# EAGLE board ponte_ampli_V1.2 (EAGLE 4.09)

Size 160 x 100 mm. Coordinates in mm from the lower left corner, seen from the top.
Outline: 0,0 160,0 160,100 0,100 0,0
Copper layers used: 

## Footprints (pad centres in the part's own frame; a part is rotated, then mirrored left to right if it is on the bottom)
C-5 = drill 0.813 pad 1.6 octagon: 1 -2.54,0; 2 2.54,0
ES-2,5L = drill 0.61 pad 1.27 octagon: 1 0,0; 2 2.54,0
DIL14 = drill 0.813 offset: 1 -7.62,-3.81; 2 -5.08,-3.81; 3 -2.54,-3.81; 4 0,-3.81; 5 2.54,-3.81; 6 5.08,-3.81; 7 7.62,-3.81; 8 7.62,3.81; 9 5.08,3.81; 10 2.54,3.81; 11 0,3.81; 12 -2.54,3.81; 13 -5.08,3.81; 14 -7.62,3.81
78XXL = drill 1.016 offset: GND 0,-3.81; IN -2.54,-3.81; OUT 2.54,-3.81 | hole 3.302: 0,11.176
R-7,5 = drill 0.813 pad 1.6 octagon: 1 -3.81,0; 2 3.81,0
S64W = drill 0.813 offset: A 2.54,1.27; E -2.54,1.27; S 0,1.27
AK500/6 = drill 1.321 offset: 1 -12.522,0; 2 -7.518,0; 3 -2.515,0; 4 2.515,0; 5 7.518,0; 6 12.522,0

## Placement (x,y rotation side)
C1  [C-5]  -28.58,-14.77 180 top  (outside the outline)
C2  [C-5]  -42.55,-2.07 270 top  (outside the outline)
C3  [C-5]  -15.88,-22.39 270 top  (outside the outline)
C4  [C-5]  -26.04,5.55 180 top  (outside the outline)
C5  [C-5]  -10.8,-2.07 270 top  (outside the outline)
C6  [ES-2,5L]  -55.25,-14.77 0 top  (outside the outline)
C7  [C-5]  -50.17,-90.97 0 top  (outside the outline)
C8  [C-5]  -50.17,-169.71 0 top  (outside the outline)
C9  [C-5]  -50.17,-178.6 0 top  (outside the outline)
C10  [C-5]  -50.17,-187.49 0 top  (outside the outline)
C11  [C-5]  -50.17,-196.38 0 top  (outside the outline)
C12  [C-5]  -50.17,-257.34 0 top  (outside the outline)
C13  [C-5]  -50.17,-336.08 0 top  (outside the outline)
C14  [C-5]  -50.17,-344.97 0 top  (outside the outline)
C15  [C-5]  -50.17,-353.86 0 top  (outside the outline)
C16  [C-5]  -50.17,-362.75 0 top  (outside the outline)
C17  [C-5]  -50.17,-423.71 0 top  (outside the outline)
C18  [C-5]  -50.17,-502.45 0 top  (outside the outline)
C19  [C-5]  -50.17,-511.34 0 top  (outside the outline)
C20  [C-5]  -50.17,-520.23 0 top  (outside the outline)
C21  [C-5]  -50.17,-529.12 0 top  (outside the outline)
C22  [C-5]  -50.17,-590.08 0 top  (outside the outline)
C23  [C-5]  -50.17,-668.82 0 top  (outside the outline)
C24  [C-5]  -50.17,-677.71 0 top  (outside the outline)
C25  [C-5]  -50.17,-686.6 0 top  (outside the outline)
C26  [C-5]  -50.17,-695.49 0 top  (outside the outline)
C27  [C-5]  -50.17,-756.45 0 top  (outside the outline)
C28  [C-5]  -50.17,-835.19 0 top  (outside the outline)
C29  [C-5]  -50.17,-844.08 0 top  (outside the outline)
C30  [C-5]  -50.17,-844.08 0 top  (outside the outline)
C31  [C-5]  -50.17,-844.08 0 top  (outside the outline)
C32  [ES-2,5L]  -64.14,-833.92 0 top  (outside the outline)
C33  [ES-2,5L]  -74.3,-833.92 0 top  (outside the outline)
C34  [ES-2,5L]  -83.19,-833.92 0 top  (outside the outline)
C35  [ES-2,5L]  -93.35,-833.92 0 top  (outside the outline)
C36  [ES-2,5L]  -103.51,-833.92 0 top  (outside the outline)
IC1  TL084P  [DIL14]  -26.04,-3.34 0 top  (outside the outline)
IC2  TL084P  [DIL14]  -45.09,-55.41 0 top  (outside the outline)
IC3  7805  [78XXL]  -51.44,-2.07 0 top  (outside the outline)
IC4  TL084P  [DIL14]  -45.09,-221.78 0 top  (outside the outline)
IC5  TL084P  [DIL14]  -45.09,-388.15 0 top  (outside the outline)
IC6  TL084P  [DIL14]  -45.09,-554.52 0 top  (outside the outline)
IC7  TL084P  [DIL14]  -45.09,-720.89 0 top  (outside the outline)
R1  [R-7,5]  -23.5,-18.58 90 top  (outside the outline)
R2  [R-7,5]  -32.39,-10.96 180 top  (outside the outline)
R3  [R-7,5]  -36.2,-18.58 90 top  (outside the outline)
R4  [R-7,5]  -40.01,-24.93 180 top  (outside the outline)
R5  [S64W]  -36.2,-28.74 180 top  (outside the outline)
R6  [R-7,5]  -37.47,-3.34 270 top  (outside the outline)
R7  [R-7,5]  -24.77,-24.93 180 top  (outside the outline)
R8  [R-7,5]  -12.07,-10.96 0 top  (outside the outline)
R9  [R-7,5]  -18.42,-14.77 90 top  (outside the outline)
R10  [R-7,5]  -29.85,-18.58 180 top  (outside the outline)
R11  [R-7,5]  -14.61,-3.34 90 top  (outside the outline)
R12  [R-7,5]  -40.01,-18.58 90 top  (outside the outline)
R13  [R-7,5]  -48.9,-66.84 0 top  (outside the outline)
R14  [R-7,5]  -48.9,-74.46 0 top  (outside the outline)
R15  [R-7,5]  -48.9,-82.08 0 top  (outside the outline)
R16  [S64W]  -50.17,-101.13 0 top  (outside the outline)
R17  [R-7,5]  -48.9,-107.48 0 top  (outside the outline)
R18  [R-7,5]  -48.9,-115.1 0 top  (outside the outline)
R19  [R-7,5]  -48.9,-122.72 0 top  (outside the outline)
R20  [R-7,5]  -48.9,-130.34 0 top  (outside the outline)
R21  [R-7,5]  -48.9,-137.96 0 top  (outside the outline)
R22  [R-7,5]  -48.9,-145.58 0 top  (outside the outline)
R23  [R-7,5]  -48.9,-153.2 0 top  (outside the outline)
R24  [R-7,5]  -48.9,-160.82 0 top  (outside the outline)
R25  [R-7,5]  -48.9,-233.21 0 top  (outside the outline)
R26  [R-7,5]  -48.9,-240.83 0 top  (outside the outline)
R27  [R-7,5]  -48.9,-248.45 0 top  (outside the outline)
R28  [S64W]  -50.17,-267.5 0 top  (outside the outline)
R29  [R-7,5]  -48.9,-273.85 0 top  (outside the outline)
R30  [R-7,5]  -48.9,-281.47 0 top  (outside the outline)
R31  [R-7,5]  -48.9,-289.09 0 top  (outside the outline)
R32  [R-7,5]  -48.9,-296.71 0 top  (outside the outline)
R33  [R-7,5]  -48.9,-304.33 0 top  (outside the outline)
R34  [R-7,5]  -48.9,-311.95 0 top  (outside the outline)
R35  [R-7,5]  -48.9,-319.57 0 top  (outside the outline)
R36  [R-7,5]  -48.9,-327.19 0 top  (outside the outline)
R37  [R-7,5]  -48.9,-399.58 0 top  (outside the outline)
R38  [R-7,5]  -48.9,-407.2 0 top  (outside the outline)
R39  [R-7,5]  -48.9,-414.82 0 top  (outside the outline)
R40  [S64W]  -50.17,-433.87 0 top  (outside the outline)
R41  [R-7,5]  -48.9,-440.22 0 top  (outside the outline)
R42  [R-7,5]  -48.9,-447.84 0 top  (outside the outline)
R43  [R-7,5]  -48.9,-455.46 0 top  (outside the outline)
R44  [R-7,5]  -48.9,-463.08 0 top  (outside the outline)
R45  [R-7,5]  -48.9,-470.7 0 top  (outside the outline)
R46  [R-7,5]  -48.9,-478.32 0 top  (outside the outline)
R47  [R-7,5]  -48.9,-485.94 0 top  (outside the outline)
R48  [R-7,5]  -48.9,-493.56 0 top  (outside the outline)
R49  [R-7,5]  -48.9,-565.95 0 top  (outside the outline)
R50  [R-7,5]  -48.9,-573.57 0 top  (outside the outline)
R51  [R-7,5]  -48.9,-581.19 0 top  (outside the outline)
R52  [S64W]  -50.17,-600.24 0 top  (outside the outline)
R53  [R-7,5]  -48.9,-606.59 0 top  (outside the outline)
R54  [R-7,5]  -48.9,-614.21 0 top  (outside the outline)
R55  [R-7,5]  -48.9,-621.83 0 top  (outside the outline)
R56  [R-7,5]  -48.9,-629.45 0 top  (outside the outline)
R57  [R-7,5]  -48.9,-637.07 0 top  (outside the outline)
R58  [R-7,5]  -48.9,-644.69 0 top  (outside the outline)
R59  [R-7,5]  -48.9,-652.31 0 top  (outside the outline)
R60  [R-7,5]  -48.9,-659.93 0 top  (outside the outline)
R61  [R-7,5]  -48.9,-732.32 0 top  (outside the outline)
R62  [R-7,5]  -48.9,-739.94 0 top  (outside the outline)
R63  [R-7,5]  -48.9,-747.56 0 top  (outside the outline)
R64  [S64W]  -50.17,-766.61 0 top  (outside the outline)
R65  [R-7,5]  -48.9,-772.96 0 top  (outside the outline)
R66  [R-7,5]  -48.9,-780.58 0 top  (outside the outline)
R67  [R-7,5]  -48.9,-788.2 0 top  (outside the outline)
R68  [R-7,5]  -48.9,-795.82 0 top  (outside the outline)
R69  [R-7,5]  -48.9,-803.44 0 top  (outside the outline)
R70  [R-7,5]  -48.9,-811.06 0 top  (outside the outline)
R71  [R-7,5]  -48.9,-818.68 0 top  (outside the outline)
R72  [R-7,5]  -48.9,-826.3 0 top  (outside the outline)
X1  [AK500/6]  -40.01,-41.44 0 top  (outside the outline)

## Library data of the parts
C1-C36 R1-R4 R6-R15 R17-R27 R29-R39 R41-R51 R53-R63 R65-R72 = discrete
IC1 IC2 IC4-IC7 = linear
IC3 = v-reg
R5 R16 R28 R40 R52 R64 = pot
X1 = con-ptr500

## Nets
+5V: IC3.OUT R1.1 R4.2 R5.A R13.1 R16.A R17.2 R25.1 R28.A R29.2 R37.1 R40.A R41.2 R49.1 R52.A R53.2 R61.1 R64.A R65.2
+12V: C6.1 C32.1 C33.1 C34.1 C35.1 C36.1 IC1.4 IC2.4 IC3.IN IC4.4 IC5.4 IC6.4 IC7.4
-12V: C6.2 C32.2 C33.2 C34.2 C35.2 C36.2 IC1.11 IC2.11 IC4.11 IC5.11 IC6.11 IC7.11
N$1: C1.1 IC1.5 R1.2 R3.1
N$2: C1.2 IC1.3 R2.1 X1.2
N$3: C5.2 IC1.9 R10.1 R11.1
N$4: C2.2 IC1.1 R6.2 R10.2
N$5: R4.1 R5.S X1.1
N$6: C4.1 IC1.10 R9.1 R12.1
N$7: C2.1 IC1.2 R6.1 R7.2
N$9: C3.1 IC1.7 R8.1 R9.2
N$10: C7.1 IC2.5 R13.2 R15.1
N$11: C7.2 IC2.3 R14.1
N$12: R16.S R17.1
N$13: C8.2 IC2.1 R18.2 R22.2
N$14: C8.1 IC2.2 R18.1 R19.2
N$15: C3.2 IC1.6 R7.1 R8.2
N$16: C9.1 IC2.7 R20.1 R21.2
N$17: C11.2 IC2.9 R22.1 R23.1
N$18: C10.1 IC2.10 R21.1 R24.1
N$19: C9.2 IC2.6 R19.1 R20.2
N$20: C12.1 IC4.5 R25.2 R27.1
N$21: C12.2 IC4.3 R26.1
N$22: R28.S R29.1
N$23: C13.2 IC4.1 R30.2 R34.2
N$24: C13.1 IC4.2 R30.1 R31.2
N$25: C14.1 IC4.7 R32.1 R33.2
N$26: C16.2 IC4.9 R34.1 R35.1
N$27: C15.1 IC4.10 R33.1 R36.1
N$28: C14.2 IC4.6 R31.1 R32.2
N$29: C17.1 IC5.5 R37.2 R39.1
N$30: C17.2 IC5.3 R38.1
N$31: R40.S R41.1
N$32: C18.2 IC5.1 R42.2 R46.2
N$33: C18.1 IC5.2 R42.1 R43.2
N$34: C19.1 IC5.7 R44.1 R45.2
N$35: C21.2 IC5.9 R46.1 R47.1
N$36: C20.1 IC5.10 R45.1 R48.1
N$37: C19.2 IC5.6 R43.1 R44.2
N$38: C22.1 IC6.5 R49.2 R51.1
N$39: C22.2 IC6.3 R50.1
N$40: R52.S R53.1
N$41: C23.2 IC6.1 R54.2 R58.2
N$42: C23.1 IC6.2 R54.1 R55.2
N$43: C24.1 IC6.7 R56.1 R57.2
N$44: C26.2 IC6.9 R58.1 R59.1
N$45: C25.1 IC6.10 R57.1 R60.1
N$46: C24.2 IC6.6 R55.1 R56.2
N$47: C27.1 IC7.5 R61.2 R63.1
N$48: C27.2 IC7.3 R62.1
N$49: R64.S R65.1
N$50: C28.2 IC7.1 R66.2 R70.2
N$51: C28.1 IC7.2 R66.1 R67.2
N$52: C29.1 IC7.7 R68.1 R69.2
N$53: C31.2 IC7.9 R70.1 R71.1
N$54: C30.1 IC7.10 R69.1 R72.1
N$55: C29.2 IC7.6 R67.1 R68.2
PE: C4.2 C10.2 C15.2 C20.2 C25.2 C30.2 IC3.GND R2.2 R3.2 R12.2 R14.2 R15.2 R24.2 R26.2 R27.2 R36.2 R38.2 R39.2 R48.2 R50.2 R51.2 R60.2 R62.2 R63.2 R72.2
VSS: C5.1 C11.1 C16.1 C21.1 C26.1 C31.1 IC1.8 IC2.8 IC4.8 IC5.8 IC6.8 IC7.8 R11.2 R23.2 R35.2 R47.2 R59.2 R71.2

## Tracks (layer width: path | path; a pad name or v marks a point on that pad's centre or on a via)
+5V  (18 unrouted)
+12V  (12 unrouted)
-12V  (11 unrouted)
N$1  (3 unrouted)
N$2  (3 unrouted)
N$3  (3 unrouted)
N$4  (3 unrouted)
N$5  (2 unrouted)
N$6  (3 unrouted)
N$7  (3 unrouted)
N$9  (3 unrouted)
N$10  (3 unrouted)
N$11  (2 unrouted)
N$12  (1 unrouted)
N$13  (3 unrouted)
N$14  (3 unrouted)
N$15  (3 unrouted)
N$16  (3 unrouted)
N$17  (3 unrouted)
N$18  (3 unrouted)
N$19  (3 unrouted)
N$20  (3 unrouted)
N$21  (2 unrouted)
N$22  (1 unrouted)
N$23  (3 unrouted)
N$24  (3 unrouted)
N$25  (3 unrouted)
N$26  (3 unrouted)
N$27  (3 unrouted)
N$28  (3 unrouted)
N$29  (3 unrouted)
N$30  (2 unrouted)
N$31  (1 unrouted)
N$32  (3 unrouted)
N$33  (3 unrouted)
N$34  (3 unrouted)
N$35  (3 unrouted)
N$36  (3 unrouted)
N$37  (3 unrouted)
N$38  (3 unrouted)
N$39  (2 unrouted)
N$40  (1 unrouted)
N$41  (3 unrouted)
N$42  (3 unrouted)
N$43  (3 unrouted)
N$44  (3 unrouted)
N$45  (3 unrouted)
N$46  (3 unrouted)
N$47  (3 unrouted)
N$48  (2 unrouted)
N$49  (1 unrouted)
N$50  (3 unrouted)
N$51  (3 unrouted)
N$52  (3 unrouted)
N$53  (3 unrouted)
N$54  (3 unrouted)
N$55  (3 unrouted)
PE  (24 unrouted)
VSS  (17 unrouted)